# EAGLE board Platine (EAGLE 9.7.0)
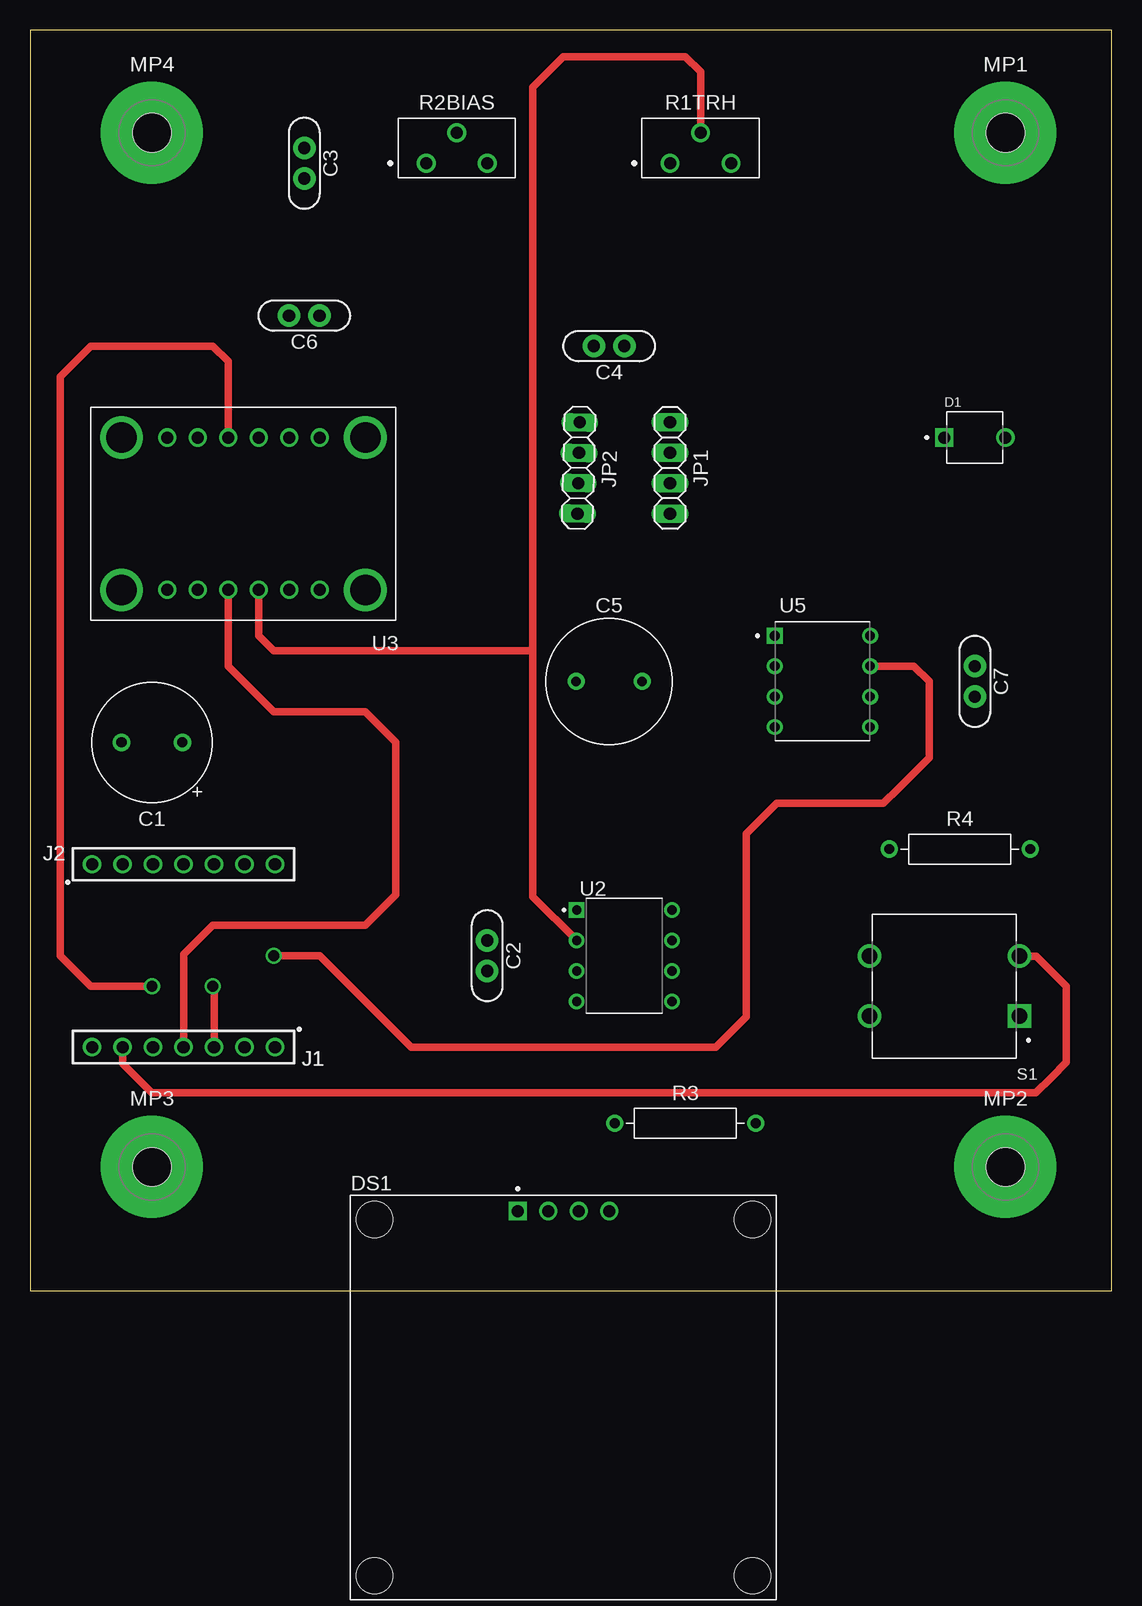
[diagram p0: board, top side]
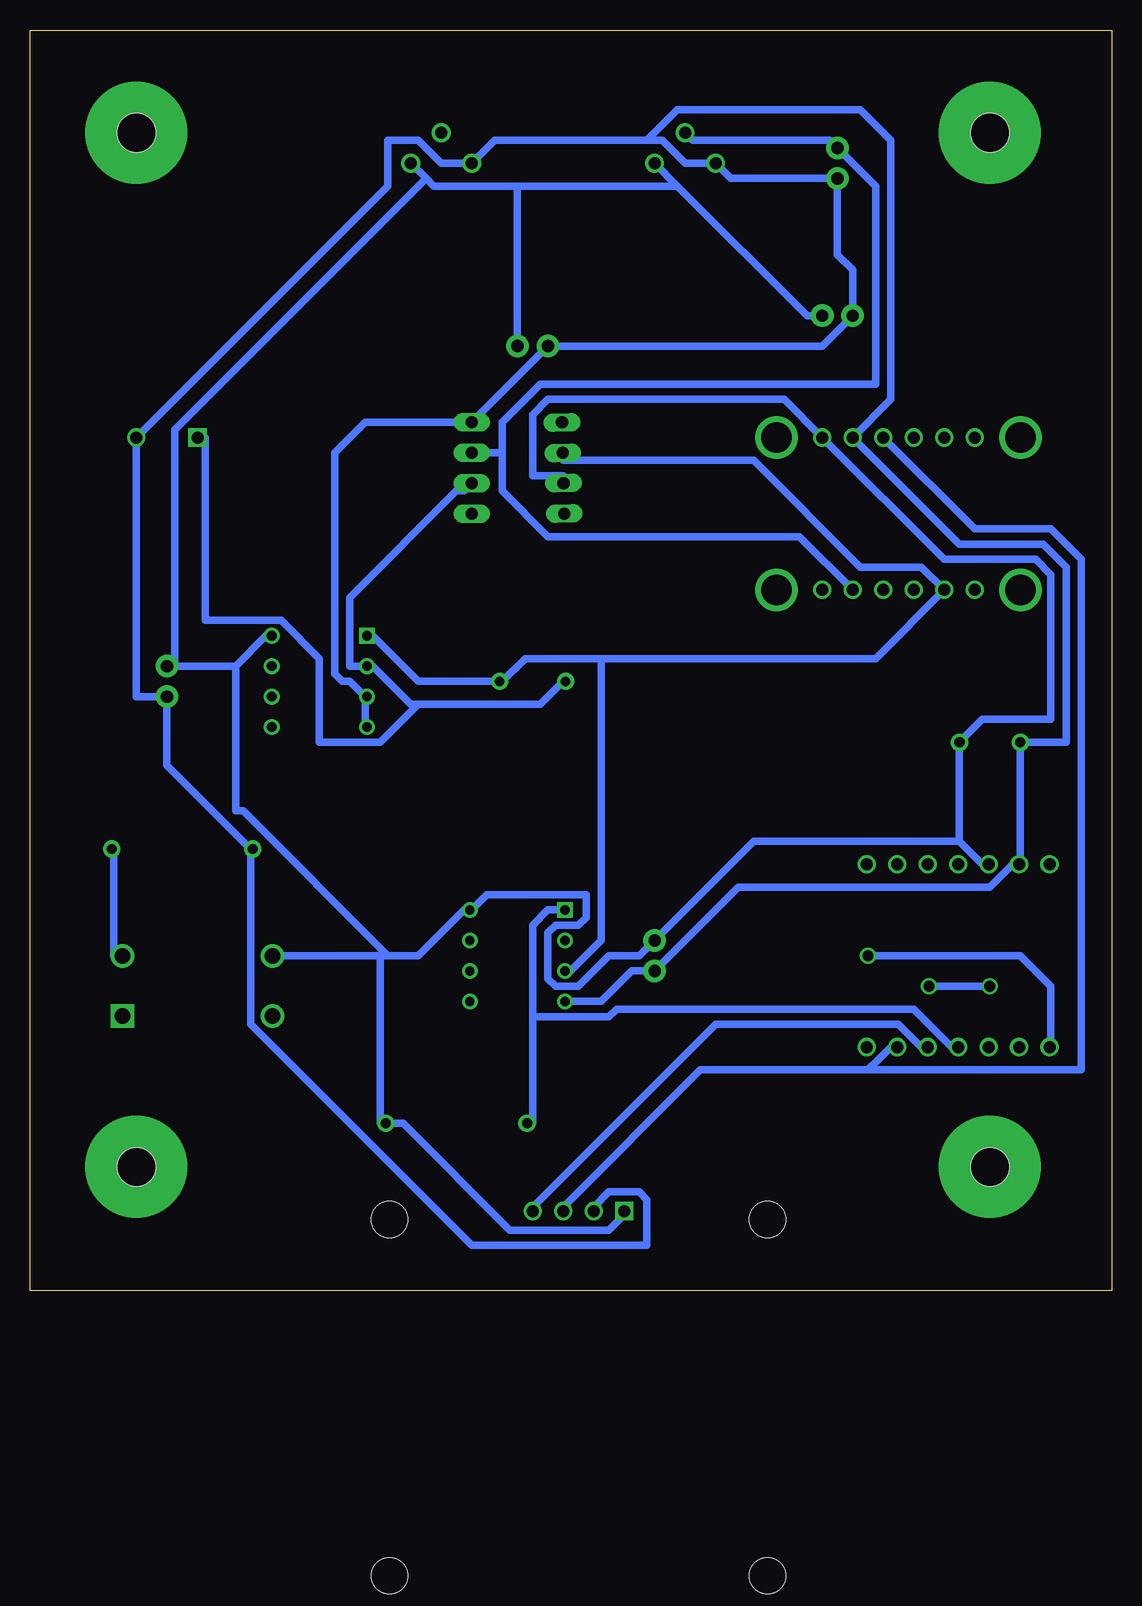
[diagram p1: board, bottom side, seen from below]

Size 90.15 x 105.08 mm. Coordinates in mm from the lower left corner, seen from the top.
Outline: 0,0 90.15,0 90.15,105.08 0,105.08 0,0
Copper layers (1*16): Top 0.035mm / dielectric 1.5mm / Bottom 0.035mm
Design rules "Fusion Electronics Design Rules": minimum track width 24mil, minimum drill 0.35mm, track to track 16mil, track to pad 12mil, pad to pad 6mil, via to via 6mil, smd to smd 6mil, copper to edge 40mil, drill to drill 6mil, minimum pad ring 10mil, minimum via ring 8mil, stop-mask expansion 4mil, vias tented up to drill 9999mil, thermal gap 10mil

## Footprints (pad centres in the part's own frame; a part is rotated, then mirrored left to right if it is on the bottom)
CAPPRD508W65D1000H1100B = drill 0.85 pad 1.45: 1 -2.54,0; 2 2.54,0
CAP-THRU-2.54MM = drill 1.016 pad 1.88: 1 -1.27,0; 2 1.27,0
CAPRD550W60D1025H1250B = drill 0.8 pad 1.4: 1 -2.75,0; 2 2.75,0
DIO_BPW34 = drill 1 pad 1.5: A 2.55,0 | drill 1 pad 1.5 square: C -2.55,0
LCD_OLED_128X64_1.3_I2C = drill 1 square: 1 -3.81,15.55 | drill 1: 2 -1.27,15.55; 3 1.27,15.55; 4 3.81,15.55 | hole 3: 15.75,14.85; -15.75,14.85; -15.75,-14.85; 15.75,-14.85
61300711821 = drill 1.02: 1 -7.62,0; 2 -5.08,0; 3 -2.54,0; 4 0,0; 5 2.54,0; 6 5.08,0; 7 7.62,0
1X04 = drill 1.016 long: 1 -3.81,0; 2 -1.27,0; 3 1.27,0; 4 3.81,0
STANDOFF_HEX_FEMALE_550X1000_M3X0.5_MTGP850H320 = drill 3.2 pad 8.5: 1 0,0 | hole 3.2: 0,0
PV36Y = drill 1 pad 1.564: 1 0,0; 2 2.54,2.54; 3 5.08,0
RESAD1176W63L850D250B = drill 0.83 pad 1.43: 1 -5.88,0; 2 5.88,0
SW_VS-1213-67-160GF = drill 1.3 square: 1 -6.25,2.5 | drill 1.3: 2 -6.25,-2.5; 3 6.25,2.5; 4 6.25,-2.5
DIP794W45P254L959H508Q8 = drill 0.78 pad 1.13 square: 1 -3.97,3.81 | drill 0.78 pad 1.13: 2 -3.97,1.27; 3 -3.97,-1.27; 4 -3.97,-3.81; 5 3.97,-3.81; 6 3.97,-1.27; 7 3.97,1.27; 8 3.97,3.81
MODULE_1085 = drill 1: JP1_1 -6.35,6.35; JP1_2 -3.81,6.35; JP1_3 -1.27,6.35; JP1_4 1.27,6.35; JP1_5 3.81,6.35; JP1_6 6.35,6.35; JP2_1 -6.35,-6.35; JP2_2 -3.81,-6.35; JP2_3 -1.27,-6.35; JP2_4 1.27,-6.35; JP2_5 3.81,-6.35; JP2_6 6.35,-6.35 | drill 2.54: SH1 -10.16,6.35; SH2 10.16,6.35; SH3 -10.16,-6.35; SH4 10.16,-6.35
DIP794W47P254L991H457Q8 = drill 0.81 pad 1.22 square: 1 -3.97,3.81 | drill 0.81 pad 1.22: 2 -3.97,1.27; 3 -3.97,-1.27; 4 -3.97,-3.81; 5 3.97,-3.81; 6 3.97,-1.27; 7 3.97,1.27; 8 3.97,3.81

## Placement (x,y rotation side)
C1  10uF  [CAPPRD508W65D1000H1100B]  10.16,45.72 180 top
C2  [CAP-THRU-2.54MM]  38.1,27.94 270 top
C3  0.1uF  [CAP-THRU-2.54MM]  22.86,93.98 270 top
C4  0.1uF  [CAP-THRU-2.54MM]  48.26,78.74 180 top
C5  470nF  [CAPRD550W60D1025H1250B]  48.26,50.8 0 top
C6  0.1uF  [CAP-THRU-2.54MM]  22.86,81.28 180 top
C7  0.1uF  [CAP-THRU-2.54MM]  78.74,50.8 270 top
D1  BPW34  [DIO_BPW34]  78.74,71.12 0 top
DS1  OLED_128X64_1.3_I2C  [LCD_OLED_128X64_1.3_I2C]  44.45,-8.89 0 top
J1  6130XX11821_61300711821  [61300711821]  12.8,20.32 180 top
J2  6130XX11821_61300711821  [61300711821]  12.8,35.56 0 top
JP1  PINHD-1X4  [1X04]  53.34,68.58 270 top
JP2  PINHD-1X4  [1X04]  45.72,68.58 268.5 top
MP1  STANDOFF_F/F_M3_10MM  [STANDOFF_HEX_FEMALE_550X1000_M3X0.5_MTGP850H320]  81.28,96.52 0 top
MP2  STANDOFF_F/F_M3_10MM  [STANDOFF_HEX_FEMALE_550X1000_M3X0.5_MTGP850H320]  81.28,10.35 0 top
MP3  STANDOFF_F/F_M3_10MM  [STANDOFF_HEX_FEMALE_550X1000_M3X0.5_MTGP850H320]  10.16,10.35 0 top
MP4  STANDOFF_F/F_M3_10MM  [STANDOFF_HEX_FEMALE_550X1000_M3X0.5_MTGP850H320]  10.16,96.52 0 top
R1TRH  [PV36Y]  53.34,93.98 0 top
R2BIAS  [PV36Y]  33.02,93.98 0 top
R3  [RESAD1176W63L850D250B]  54.61,13.97 0 top
R4  [RESAD1176W63L850D250B]  77.47,36.83 0 top
S1  VS-1213-67-160GF  [SW_VS-1213-67-160GF]  76.2,25.4 180 top
U2  TLC372CP  [DIP794W45P254L959H508Q8]  49.53,27.94 0 top
U3  1085  [MODULE_1085]  17.78,64.77 180 top
U5  MAX323CPA+  [DIP794W47P254L991H457Q8]  66.04,50.8 0 top

## Library data of the parts
C1 = Capacitor; CATEGORY: Capacitor; PACKAGE_SIZE: 11MM-DIA; PACKAGE_TYPE: Through Hole; SUBCATEGORY: Aluminum Electrolytic Capacitors; TYPE: Radial Can
C2-C4 C6 C7 = Tinkercad
C5 = Capacitor; CATEGORY: Capacitor; PACKAGE_SIZE: 12.5MM-DIA; PACKAGE_TYPE: Through Hole; SUBCATEGORY: Aluminum Non-Polar Capacitors; TYPE: Radial Can
D1 = BPW34; AVAILABILITY: In Stock; CHECK_PRICES: https://www.snapeda.com/parts/BPW34/Vishay/view-part/?ref=eda; DESCRIPTION: Photodiode 900nm - 130° 2-DIP (0.200, 5.10mm); MF: Vishay Semiconductor; MP: BPW34; PACKAGE: None; PRICE: None; SNAPEDA_LINK: https://www.snapeda.com/parts/BPW34/Vishay/view-part/?ref=snap
DS1 = OLED_128X64_1.3_I2C; AVAILABILITY: Not in stock; CHECK_PRICES: https://www.snapeda.com/parts/OLED%20128x64%201.3%22%20I2C/UNIVERSAL-SOLDER+Electronics+Ltd/view-part/?ref=eda; DESCRIPTION: Non-Touch Graphic LCD Display Module Transmissive White OLED, Monochrome I2C 1.3 (33.02mm) 128 x 64; MF: UNIVERSAL-SOLDER Electronics Ltd; MP: OLED 128x64 1.3&quot; I2C; PACKAGE: None; PRICE: None; SNAPEDA_LINK: https://www.snapeda.com/parts/OLED%20128x64%201.3%22%20I2C/UNIVERSAL-SOLDER+Electronics+Ltd/view-part/?ref=snap
J1 J2 = 6130XX11821_61300711821; AVAILABILITY: In Stock; CHECK_PRICES: https://www.snapeda.com/parts/61300711821/W%25C3%25BCrth+Elektronik+Midcom/view-part/?ref=eda; DESCRIPTION: Single Row / Straight / Without Shroud Female header Female 7 | Würth Elektronik 61300711821 @ Pin header, socket (Si...; MF: Würth Elektronik; MP: 61300711821; PACKAGE: None; PRICE: None; SNAPEDA_LINK: https://www.snapeda.com/parts/61300711821/W%25C3%25BCrth+Elektronik+Midcom/view-part/?ref=snap
JP1 JP2 = Connector; CATEGORY: Connectors; DESCRIPTION: Header-Straight-4 Position; PACKAGE_TYPE: Through Hole; PITCH: 0.100" (2.54mm); SUBCATEGORY: Headers; TYPE: Male Pins
MP1-MP4 = PCB-Fasteners_Hardware; CATEGORY: Standoff/Spacer; DESCRIPTION: Hex Standoff Threaded M3 10 mm; HEIGHT: 10 mm; PACKAGE_SIZE: NA; PACKAGE_TYPE: NA; SUBCATEGORY: Female-Female; THREADED: Threaded; THREAD_SIZE: M3; TYPE: Hex Standoff
R1TRH R2BIAS = Resistor; CATEGORY: Potentiometers; DATASHEET: https://www.bourns.com/docs/Product-Datasheets/pv36.pdf; DESCRIPTION: 0.5W 1/2W PC Pins Through Hole Trimmer Potentiometer Cermet 25.0 Turn Top Adjustment; MANUFACTURER: Bourns Inc.; MPN: PV36Yx; OPERATING_TEMPERATURE: -55°C ~ 125°C; PACKAGE_SIZE: NA; PACKAGE_TYPE: Through Hole; PART_STATUS: Active; ROHS: Compliant; SERIES: PV36; SUBCATEGORY: Trimmer Potentiometers; TEMPERATURE_COEFFICIENT: ±100ppm/°C; THERMALLOSS: 0.5 W; TOLERANCE: ±10%; TYPE: Top Adjustment Triangle Leads
R3 R4 = Resistor; CATEGORY: Resistors; DESCRIPTION: Axial Resistor 11.76 mm pitch 8.5 mm body length 2.5 mm body diameter; PACKAGE_SIZE: Axial; PACKAGE_TYPE: Through Hole
S1 = VS-1213-67-160GF; AVAILABILITY: In Stock; CHECK_PRICES: https://www.snapeda.com/parts/VS-1213-67-160GF/Valcon/view-part/?ref=eda; DESCRIPTION: Valcon 12 x 12mm PCB Mount Flat Tactile Switch; MF: Valcon; MP: VS-1213-67-160GF; PACKAGE: None; PRICE: None; SNAPEDA_LINK: https://www.snapeda.com/parts/VS-1213-67-160GF/Valcon/view-part/?ref=snap
U2 = TLC372CP; AVAILABILITY: In Stock; CHECK_PRICES: https://www.snapeda.com/parts/TLC372CP/Texas+Instruments/view-part/?ref=eda; DESCRIPTION: Dual General Purpose LinCMOS™ Differential Comparator; MF: Texas Instruments; MP: TLC372CP; PACKAGE: PDIP-8 Texas; PRICE: None; SNAPEDA_LINK: https://www.snapeda.com/parts/TLC372CP/Texas+Instruments/view-part/?ref=snap
U3 = 1085; AVAILABILITY: In Stock; CHECK_PRICES: https://www.snapeda.com/parts/1085/Adafruit+Industries/view-part/?ref=eda; DESCRIPTION: ADS1115 series 16 Bit 860 Samples per Second Analog to Digital Converter (ADC) Evaluation Board; MF: Adafruit Industries; MP: 1085; PACKAGE: NON STANDARD-16 Adafruit; PRICE: None; SNAPEDA_LINK: https://www.snapeda.com/parts/1085/Adafruit+Industries/view-part/?ref=snap
U5 = MAX323CPA_; AVAILABILITY: In Stock; CHECK_PRICES: https://www.snapeda.com/parts/MAX323CPA+/Analog+Devices/view-part/?ref=eda; DESCRIPTION: Analog Switch Dual SPST 8-Pin PDIP N Tube; MF: Analog Devices; MP: MAX323CPA+; PACKAGE: PDIP-8 Maxim; PRICE: None; SNAPEDA_LINK: https://www.snapeda.com/parts/MAX323CPA+/Analog+Devices/view-part/?ref=snap

## Nets
3.3V: C1.1 C2.1 C4.1 C6.1 C7.1 DS1.1 J2.3 JP2.3 R1TRH.3 R2BIAS.3 R3.2 S1.4 U2.8 U3.JP2_1 U5.8
GND: C1.2 C2.2 C3.2 C4.2 C6.2 C7.2 D1.A DS1.2 J2.2 JP1.1 R1TRH.1 R2BIAS.1 R4.1 U2.4 U3.JP2_2 U5.3 U5.4
N$4: C3.1 JP1.2 R2BIAS.2 U3.JP1_2
N$5: R1TRH.2 U2.2 U3.JP1_3
N$8: J1.7 U5.7
N$9: J1.6 R4.2 S1.2
N$11: J1.4 R3.1 U2.1 U3.JP1_4
N$12: DS1.4 J1.3 U3.JP2_4
N$13: DS1.3 J1.2 U3.JP2_3
N$17: C5.2 JP2.2 U2.3 U3.JP1_5 U5.1
N$22: C5.1 D1.C JP1.3 U5.2

## Tracks (layer width: path | path; a pad name or v marks a point on that pad's centre or on a via)
3.3V
  Bottom 0.61: JP2.3 45.72,67.95 48.26,67.95 48.26,73.03 46.99,74.3 27.3,74.3 U3.JP2_1 13.97,60.96 6.35,60.96 5.08,59.69 5.08,47.62 10.8,47.62 C1.1 12.7,37.46 | 12.7,37.46 10.8,35.56 J2.3 | 12.7,37.46 29.84,37.46 C2.1 39.37,27.94 41.91,27.94 44.45,25.4 46.35,25.4 46.99,26.04 46.99,29.84 46.35,30.48 44.45,30.48 43.81,31.11 43.81,33.02 52.07,33.02 53.34,31.75 U2.8 53.98,31.75 57.78,27.94 60.32,27.94 | 36.2,92.08 25.4,81.28 C6.1 | 36.2,92.08 R2BIAS.3 | 57.15,92.71 56.52,92.08 49.53,92.08 | 57.15,92.71 R1TRH.3 | 36.2,92.08 49.53,92.08 | 49.53,92.08 C4.1 | 73.03,52.07 70.48,54.61 U5.8 | 78.11,52.07 C7.1 78.11,52.07 | 78.11,52.07 73.03,52.07 | 60.96,27.94 69.85,27.94 S1.4 | 60.96,27.94 60.32,27.94 | 60.96,27.94 60.96,13.97 R3.2 60.32,13.97 59.05,13.97 50.16,5.08 41.91,5.08 40.64,6.35 DS1.1 | 73.03,52.07 73.03,40.01 72.39,40.01 60.32,27.94 | 57.15,92.71 78.11,71.76 78.11,52.07
GND
  Bottom 0.61: 71.76,36.83 78.74,43.81 C7.2 81.28,49.53 D1.A | 71.76,36.83 R4.1 71.76,36.83 | 71.76,36.83 71.76,22.22 53.34,3.81 38.73,3.81 38.73,7.62 39.37,8.25 41.91,8.25 43.18,6.99 DS1.2 | D1.A | U2.4 45.09,24.13 42.55,24.13 40.01,26.67 C2.2 31.11,33.66 10.16,33.66 8.25,35.56 J2.2 7.62,35.56 C1.2 3.81,45.72 3.81,60.32 5.71,62.23 12.7,62.23 U3.JP2_2 18.41,74.3 18.41,95.89 20.95,98.43 36.2,98.43 38.73,95.89 | 38.73,95.89 37.46,95.89 35.56,93.98 34.29,93.98 R2BIAS.1 31.75,92.71 C3.2 22.86,86.36 21.59,85.09 C6.2 24.13,78.74 C4.2 JP1.1 62.23,72.39 64.77,69.85 64.77,51.44 64.14,50.8 63.5,50.8 62.23,49.53 | 38.73,95.89 51.44,95.89 R1TRH.1 55.88,93.98 57.78,95.89 60.32,95.89 60.32,92.08 D1.A | 62.23,49.53 62.23,46.99 U5.4 | 62.23,49.53 U5.3 62.23,49.53
N$4
  Bottom 0.61: R2BIAS.2 34.92,95.89 23.49,95.89 C3.1 19.68,92.08 19.68,75.57 47.62,75.57 50.8,72.39 50.8,69.85 | U3.JP1_2 26.04,62.87 46.99,62.87 50.8,66.68 50.8,69.85 | JP1.2 50.8,69.85
N$5
  Top 0.61: U2.2 41.91,32.86 41.91,53.34 | 41.91,53.34 41.91,64.77 41.91,100.33 44.45,102.87 54.61,102.87 55.88,101.6 R1TRH.2 | U3.JP1_3 19.05,54.61 20.32,53.34 41.91,53.34
N$8  (via drill 0.9)
  Top 0.61: U5.7 73.66,52.07 74.93,50.8 74.93,44.45 72.39,41.91 71.12,40.64 62.23,40.64 59.69,38.1 59.69,35.56 59.69,22.86 57.15,20.32 31.75,20.32 26.67,25.4 24.13,27.94 v20.32,27.94
  Bottom 0.61: v20.32,27.94 10.16,27.94 7.62,27.94 5.08,25.4 5.08,22.86 | 5.08,22.86 5.08,20.32 | J1.7 5.08,20.42 5.08,22.86
N$9
  Top 0.61: S1.2 83.86,27.9 86.36,25.4 86.36,19.05 85.09,17.78 83.82,16.51 10.16,16.51 7.72,18.95 J1.6
  Bottom 0.61: R4.2 83.19,36.83 83.19,27.94 82.55,27.94 S1.2
N$11
  Top 0.61: J1.4 12.8,28.04 15.24,30.48 27.94,30.48 30.48,33.02 30.48,45.72 27.94,48.26 20.32,48.26 16.51,52.07 U3.JP1_4
  Bottom 0.61: 48.26,22.86 48.26,13.97 R3.1 | 48.26,22.86 48.26,30.48 46.99,31.75 45.72,31.75 U2.1 | 48.26,22.86 41.91,22.86 41.27,23.49 16.51,23.49 13.34,20.32 J1.4
N$12  (via drill 0.9)
  Top 0.61: J1.3 15.34,25.3 v15.24,25.4 | v10.16,25.4 5.08,25.4 2.54,27.94 2.54,76.2 5.08,78.74 15.24,78.74 16.51,77.47 U3.JP2_4
  Bottom 0.61: DS1.4 48.26,6.99 33.02,22.22 17.78,22.22 15.88,20.32 J1.3 | v15.24,25.4 v10.16,25.4
N$13
  Bottom 0.61: 20.32,18.41 34.29,18.41 45.72,6.99 DS1.3 | 20.32,18.41 19.37,19.37 18.41,20.32 J1.2 | U3.JP2_3 11.43,63.5 5.08,63.5 2.54,60.96 2.54,18.41 20.32,18.41
N$17
  Bottom 0.61: 42.55,52.7 42.55,29.21 45.09,26.67 U2.3 | 42.55,52.7 48.89,52.7 50.8,50.8 C5.2 51.44,50.8 57.78,50.8 61.59,54.61 U5.1 | 42.55,52.7 19.68,52.7 U3.JP1_5 15.88,60.32 20.95,60.32 29.84,69.22 45.72,69.22 JP2.2
N$22
  Bottom 0.61: 57.78,48.89 47.62,48.89 45.72,50.8 C5.1 | 57.78,48.89 58.42,48.89 61.59,52.07 U5.2 62.23,52.07 63.5,52.07 63.5,57.78 54.61,66.68 53.98,66.68 JP1.3 | 57.78,48.89 60.96,45.72 66.04,45.72 66.04,52.7 69.22,55.88 75.57,55.88 75.57,71.12 D1.C